# Altium PCB Module13.2_Proto_Board.PcbDoc
Units mm, origin at the board's own origin, x right, y up, seen from the top; angles counter-clockwise.
Board outline 50.1 x 50.1 mm, 2 copper layers (Top Layer, Bottom Layer); 2 components, 31 nets, 374 pads, 0 vias.
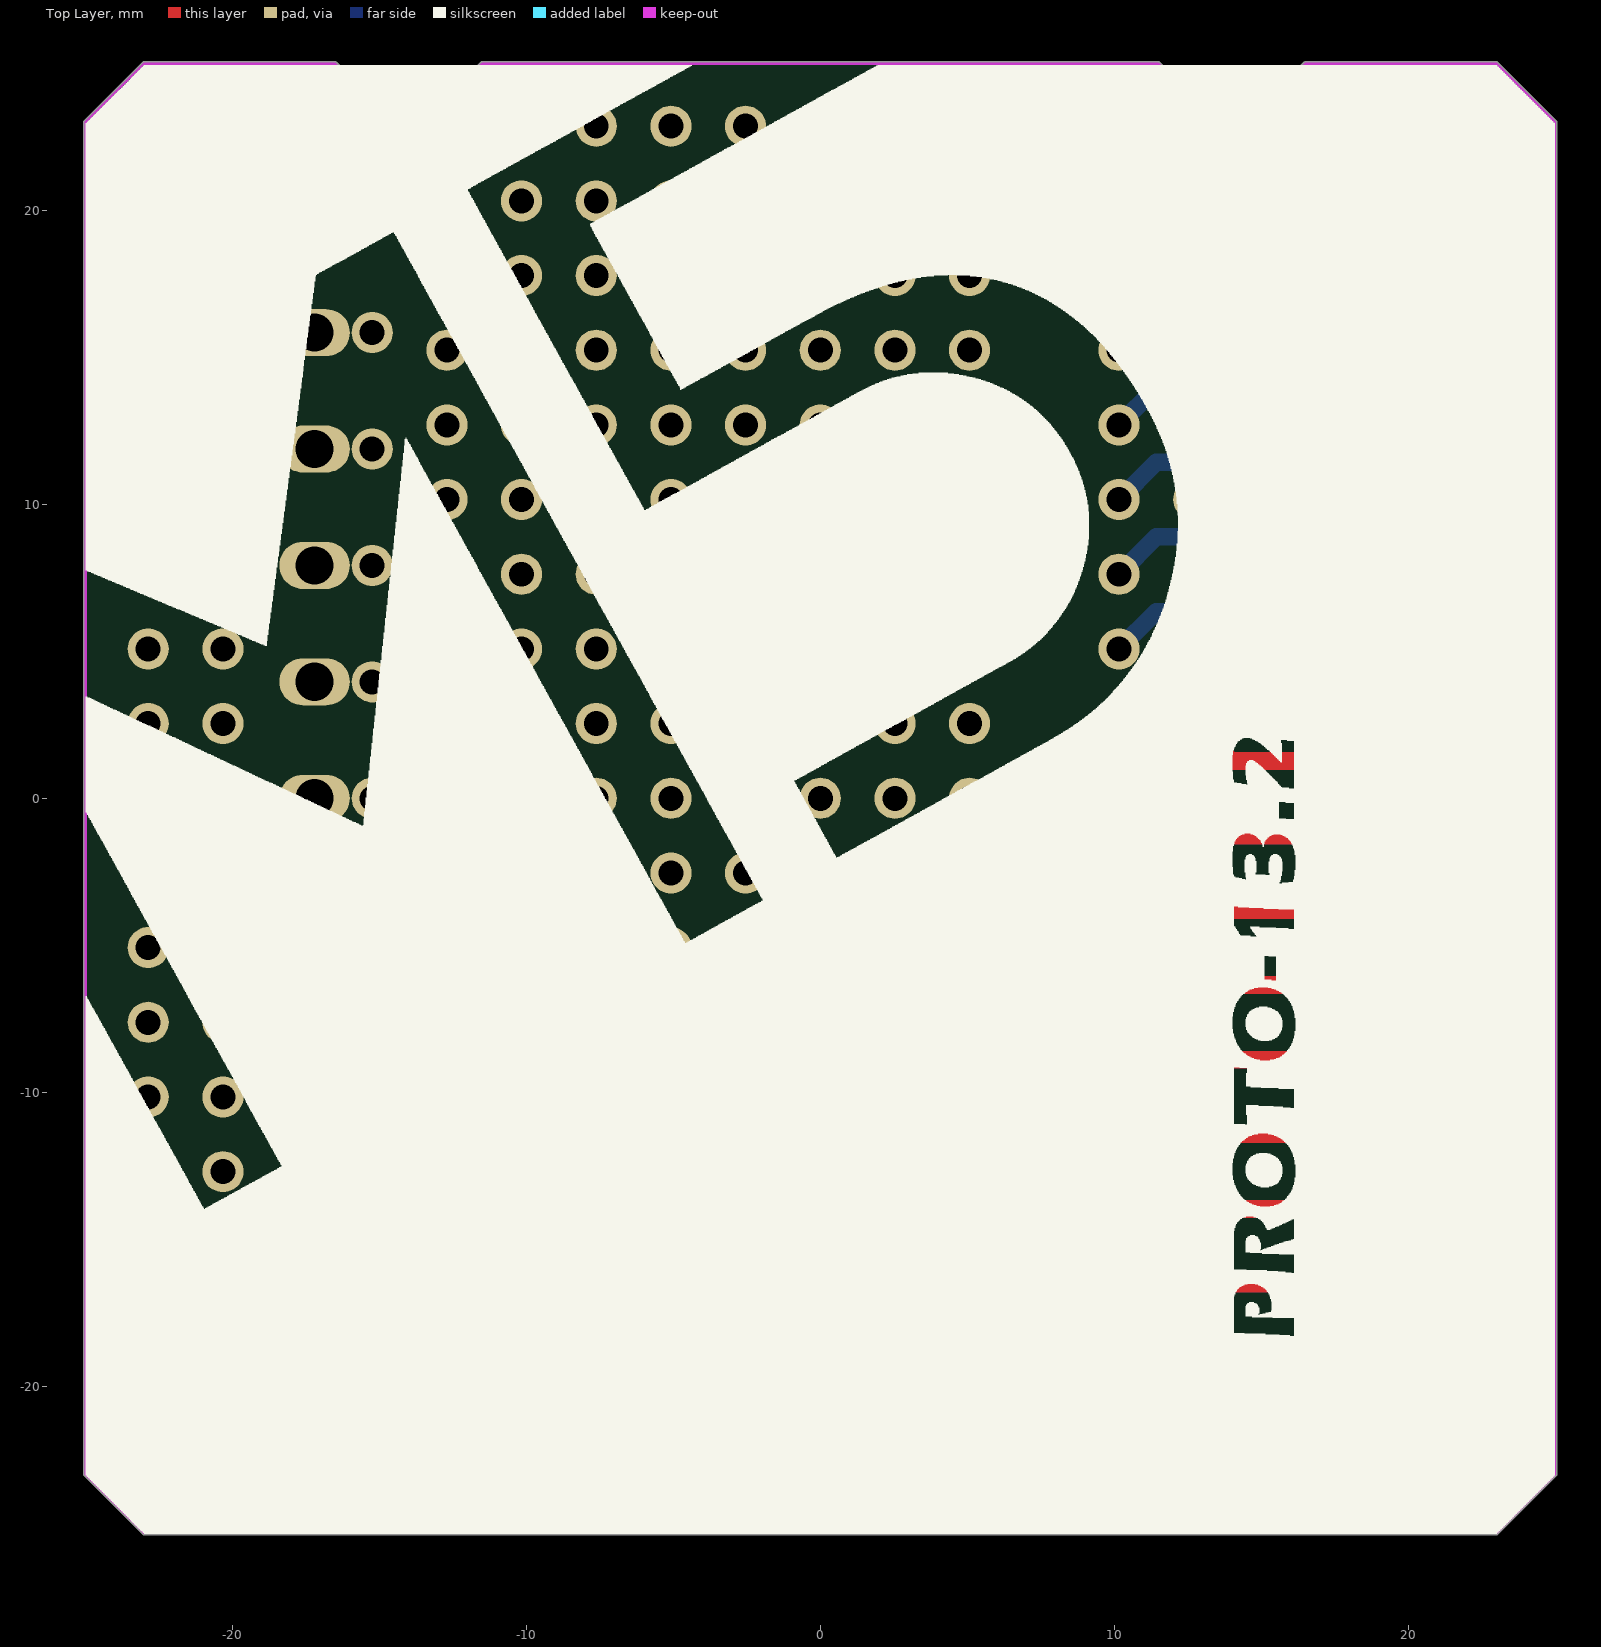
[diagram p0: Top Layer view]
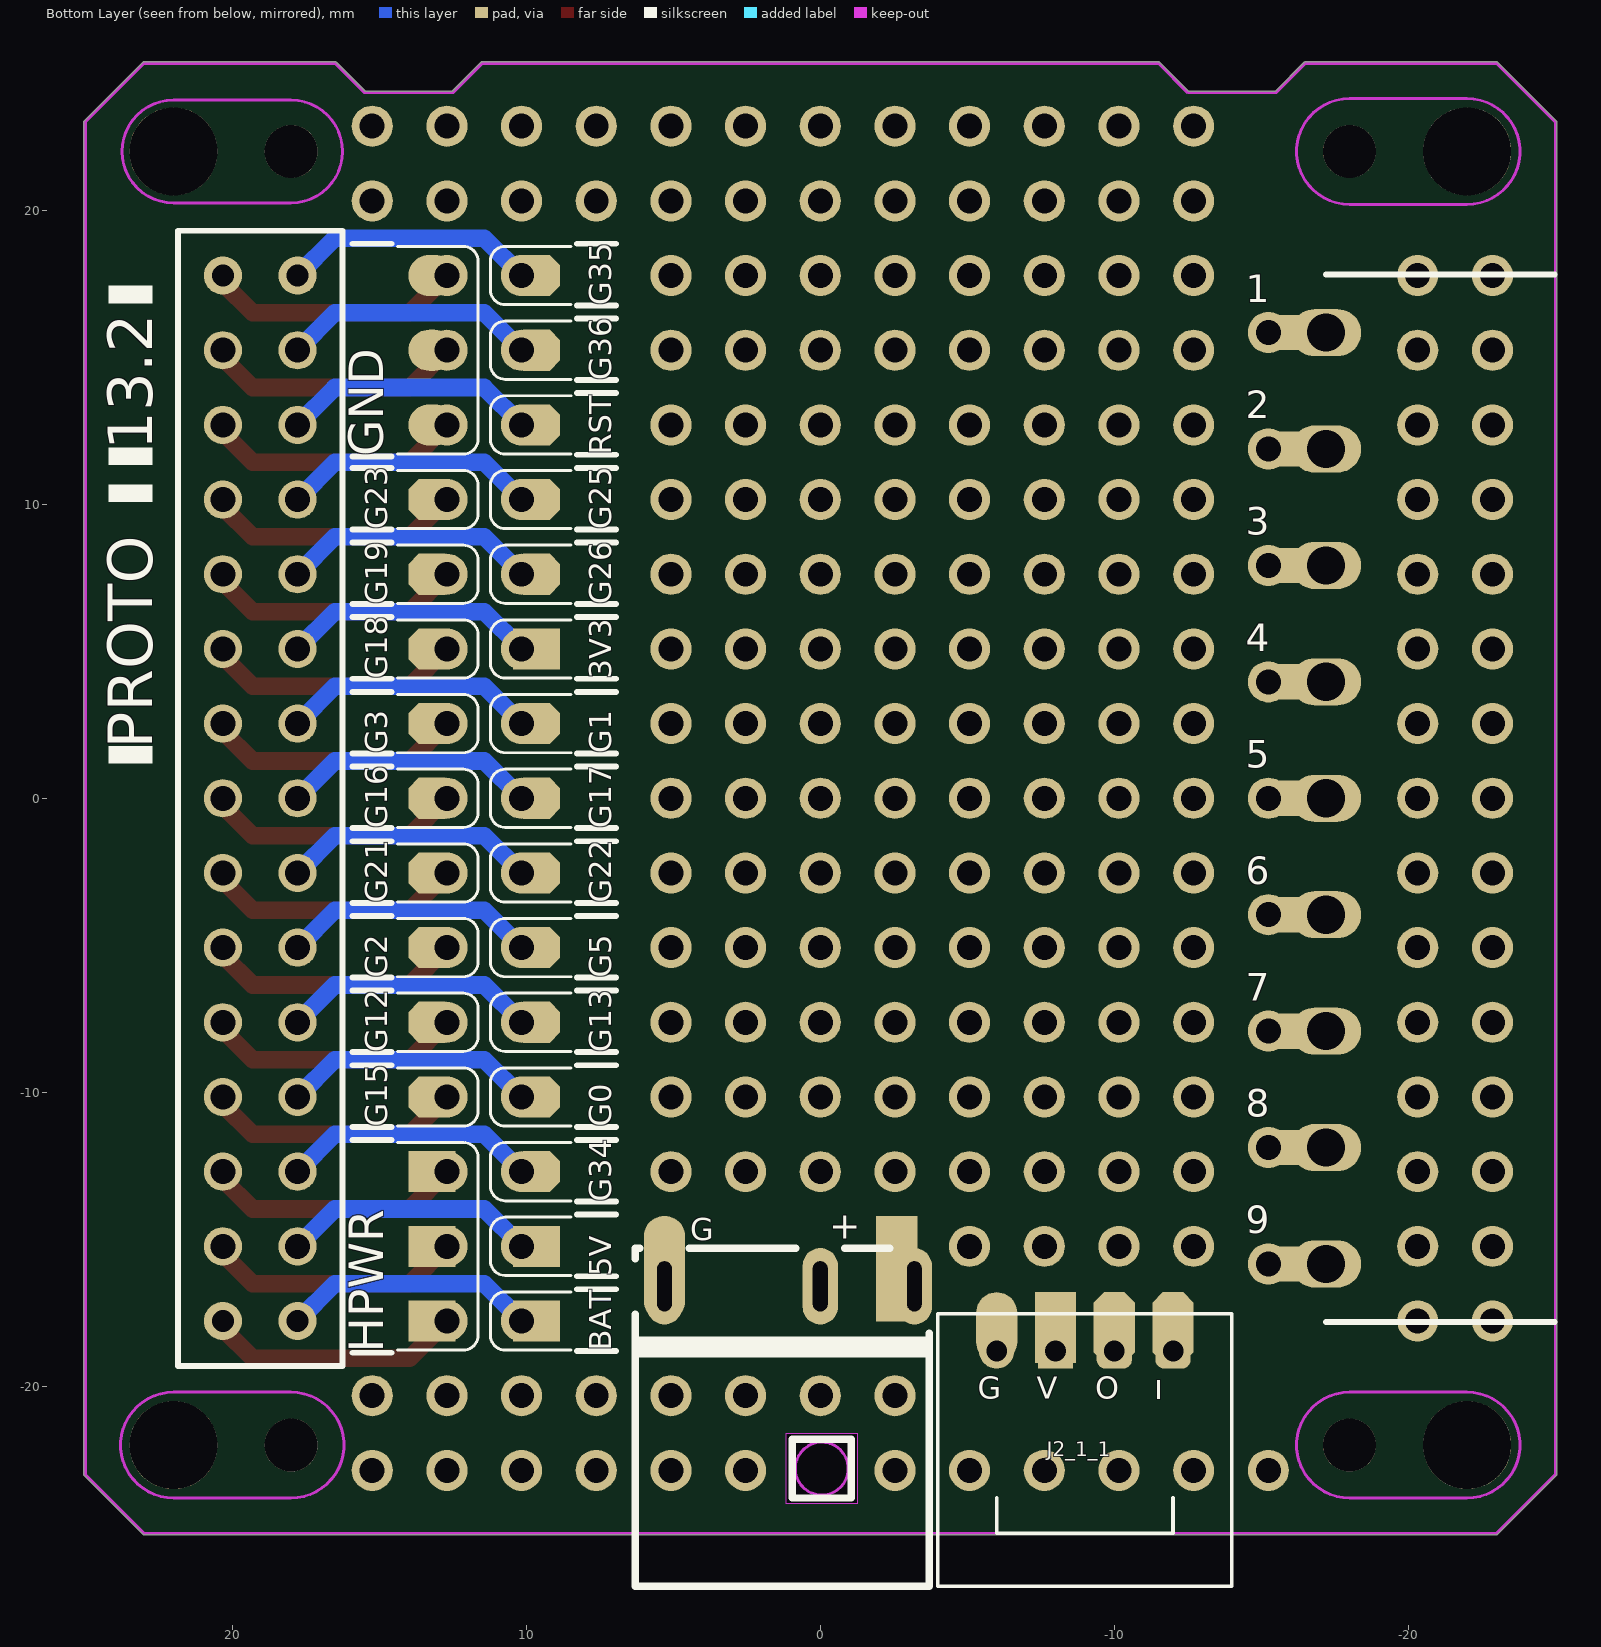
[diagram p1: Bottom Layer view, seen from below]

## Layer stack, top to bottom
Top Solder: solder mask 0.0102, Solder Resist, Dk 3.5
Top Layer: signal copper 0.0356
Dielectric1: dielectric 0.32, FR-4, Dk 4.8
Bottom Layer: signal copper 0.0356
Bottom Solder: solder mask 0.0102, Solder Resist, Dk 3.5

## Board outline
-25.035,-23.036 cw(c-25,-23) -25.05,-23 -25.05,23 cw(c-25,23) -25.035,23.036 -25.036,23.036 -23.036,25.036 -23.036,25.035 cw(c-23,25) -23,25.05 -16.501,25.05 cw(c-16.5,25) -16.464,25.035 -16.464,25.036 -15.479,24.05 -12.521,24.05 -11.536,25.036 -11.536,25.035 cw(c-11.5,25) -11.5,25.05 -2.5,25.05 8.25,25.05 cw(c8.25,25) 8.251,25.05 11.5,25.05 cw(c11.5,25) 11.536,25.035 11.536,25.036 12.521,24.05 15.479,24.05 16.464,25.036 16.464,25.035 cw(c16.5,25) 16.5,25.05 23,25.05 cw(c23,25) 23.036,25.035 23.036,25.036 25.036,23.036 25.035,23.036 cw(c25,23) 25.05,23 25.05,-23 cw(c25,-23) 25.035,-23.036 25.036,-23.036 23.036,-25.036 23.036,-25.035 cw(c23,-25) 22.999,-25.05 -2.5,-25.05 ccw(c-2.5,-25) -2.499,-25.05 -2.5,-25.05 -23,-25.05 cw(c-23,-25) -23.036,-25.035 -23.036,-25.036 ccw(c-23,-25) -22.998,-25.05 -23.036,-25.036

## Design rules (kind name [scope] priority, off if disabled: settings)
Clearance [All] p1: gap=0.254 ignorepadtopadclearanceinfootprint=FALSE except(0: Arc-Hole Track-Hole SMDPad-Hole THPad-Hole Via-Hole Fill-Hole Poly-Hole Region-Hole Text-Hole)
PolygonConnect [All] p1: connectstyle=Direct reliefconductorwidth=0.254 reliefentries=4 polygonreliefangle="90 Angle" airgapwidth=0.254
RoutingVias [All] p1: holewidth=0.3 width=0.6 viastyle="Through Hole" minholewidth=0.2 minwidth=0.6 maxholewidth=0.3 maxwidth=0.8
SolderMaskExpansion [All] p1: expansion=0.102
Width [InNet('No Net')] p1: maxlimit=0.254 minlimit=0.254 preferedwidth=0.254
30 further rules are at their usual default settings.

## Components (designator, comment, footprint, x,y, rotation, side; value= is the part's Value field where it differs from the comment)
J2_1_1 "GPIO_Socket_4P" Grove -9,-25 r270 bottom (schematic designator J2)
PWR1 "DC-IN-TH_DC-0440-2.5A-2.0" DC-IN-TH_DC-0440-2.5A-2.0 1.05,-16.6 r90 bottom locked

## Footprints (in the part's own frame and the unit in brackets; to place one, negate y for a bottom-side part, rotate by r counter-clockwise, add the part's x,y. Pads: shape width x height; smd on the part's side, far side on the other; paste and mask are expansions set on the pad)
DC-IN-TH_DC-0440-2.5A-2.0 [mm]
  oval 2.6x1.2 hole 0.5 slot 1.7 at 0 deg: 2-(0,4.25) 3(0,-1.05) 4+(0,-4.25)
  Keep-Out Layer board cut-out: -7.4,-2.3 -7.4,0.1 -5,0.1 -5,-2.3
  silkscreen extent -10.2,-4.75 1.3,5.25
Grove [mm]
  rect 1.2x1.2 hole 0.7: 5V(-6.2,-1)
  rrect50% 1.2x1.2 hole 0.7: G25(-6.2,1) G35(-6.2,3)
  round 1.2 hole 0.7: GND(-6.2,-3)
  silkscreen extent -7.47,-5 1.8,5

## Free pads (board coordinates)
  round 3 hole 3: 0(-22,-22) 0(-22,22) 0(22,-22) 0(22,22)
  round 1.8 hole 1.8: 0(-18,-22) 0(-18,22) 0(18,-22) 0(18,22)
  rrect100% 2.4x1.2 smd far side: 2(-16,-15.84) 2(-16,-11.88) 2(-16,-7.92) 2(-16,-3.96) 2(-16,0) 2(-16,3.96) 2(-16,7.92) 2(-16,11.88) 2(-16,15.84)
  oct 1.4x2.4 smd far side: 2(-12,-18) 2(-10,-18)
  rect 1.4x2.4 smd far side: 2(-8,-18)
  oval 1.4x2.4 smd far side: 2(-6,-18)
  rect 1.4x3.6 smd far side: 2(-2.6,-16)
  oval 1.4x3.6 smd far side: 2(5.3,-16)
  rect 1.6x1.4 smd far side: 2(9.652,-17.78) 2(9.652,-15.24) 2(9.652,5.08) 2(13.208,-17.78) 2(13.208,-15.24) 2(13.208,-12.7)
  oct 1.6x1.4 smd far side: 2(9.652,-12.7) 2(9.652,-10.16) 2(9.652,-7.62) 2(9.652,-5.08) 2(9.652,-2.54) 2(9.652,0) 2(9.652,2.54) 2(9.652,7.62) 2(9.652,10.16) 2(9.652,12.7) 2(9.652,15.24) 2(9.652,17.78) 2(13.208,-10.16) 2(13.208,-7.62) 2(13.208,-5.08) 2(13.208,-2.54) 2(13.208,0) 2(13.208,2.54) 2(13.208,5.08) 2(13.208,7.62) 2(13.208,10.16)
  rrect100% 1.6x1.4 smd far side: 2(13.208,12.7) 2(13.208,15.24) 2(13.208,17.78)
  rect 1x1.3 smd: 2(17.3,17.78) 2(20.8,17.78) 4(17.3,15.24) 4(20.8,15.24) 6(17.3,12.7) 6(20.8,12.7) 8(17.3,10.16) 8(20.8,10.16) 10(17.3,7.62) 10(20.8,7.62) 12(17.3,5.08) 12(20.8,5.08) 14(17.3,2.54) 14(20.8,2.54) 16(17.3,0) 16(20.8,0) 18(17.3,-2.54) 18(20.8,-2.54) 20(17.3,-5.08) 20(20.8,-5.08) 22(17.3,-7.62) 22(20.8,-7.62) 24(17.3,-10.16) 24(20.8,-10.16) 26(17.3,-12.7) 26(20.8,-12.7) 28(17.3,-15.24) 28(20.8,-15.24) 30(17.3,-17.78) 30(20.8,-17.78)
  round 3.6 on Top Solder: 35(-22,-22) 35(-22,22) 35(-18,-22) 35(-18,22) 35(18,-22) 35(22,-22)
  round 3.6 on Bottom Solder: 35(-22,-22) 35(-22,22) 35(-18,-22) 35(-18,22) 35(18,-22) 35(22,-22)
  round 3.5 on Bottom Solder: 35(18,22) 35(22,22)
  round 3.5 on Top Solder: 35(18,22) 35(22,22)
  round 1 on Bottom Overlay: 35(22.711,1.68) 35(22.711,10.18) 35(22.711,11.84) 35(22.711,16.936) 35(24.211,1.68) 35(24.211,10.18) 35(24.211,11.84) 35(24.211,16.936)
  round 1.4 hole 0.85: ""(-22.86,-17.78) ""(-22.86,-15.24) ""(-22.86,-12.7) ""(-22.86,-10.16) ""(-22.86,-7.62) ""(-22.86,-5.08) ""(-22.86,-2.54) ""(-22.86,0) ""(-22.86,2.54) ""(-22.86,5.08) ""(-22.86,7.62) ""(-22.86,10.16) ""(-22.86,12.7) ""(-22.86,15.24) ""(-22.86,17.78) ""(-20.32,-17.78) ""(-20.32,-15.24) ""(-20.32,-12.7) ""(-20.32,-10.16) ""(-20.32,-7.62) ""(-20.32,-5.08) ""(-20.32,-2.54) ""(-20.32,0) ""(-20.32,2.54) ""(-20.32,5.08) ""(-20.32,7.62) ""(-20.32,10.16) ""(-20.32,12.7) ""(-20.32,15.24) ""(-20.32,17.78) ""(-15.24,-22.86) ""(-15.24,-15.84) ""(-15.24,-11.88) ""(-15.24,-7.92) ""(-15.24,-3.96) ""(-15.24,0) ""(-15.24,3.96) ""(-15.24,7.92) ""(-15.24,11.88) ""(-15.24,15.84) ""(-12.7,-22.86) ""(-12.7,-15.24) ""(-12.7,-12.7) ""(-12.7,-10.16) ""(-12.7,-7.62) ""(-12.7,-5.08) ""(-12.7,-2.54) ""(-12.7,0) ""(-12.7,2.54) ""(-12.7,5.08) ""(-12.7,7.62) ""(-12.7,10.16) ""(-12.7,12.7) ""(-12.7,15.24) ""(-12.7,17.78) ""(-12.7,20.32) ""(-12.7,22.86) ""(-10.16,-22.86) ""(-10.16,-15.24) ""(-10.16,-12.7) ""(-10.16,-10.16) ""(-10.16,-7.62) ""(-10.16,-5.08) ""(-10.16,-2.54) ""(-10.16,0) ""(-10.16,2.54) ""(-10.16,5.08) ""(-10.16,7.62) ""(-10.16,10.16) ""(-10.16,12.7) ""(-10.16,15.24) ""(-10.16,17.78) ""(-10.16,20.32) ""(-10.16,22.86) ""(-7.62,-22.86) ""(-7.62,-15.24) ""(-7.62,-12.7) ""(-7.62,-10.16) ""(-7.62,-7.62) ""(-7.62,-5.08) ""(-7.62,-2.54) ""(-7.62,0) ""(-7.62,2.54) ""(-7.62,5.08) ""(-7.62,7.62) ""(-7.62,10.16) ""(-7.62,12.7) ""(-7.62,15.24) ""(-7.62,17.78) ""(-7.62,20.32) ""(-7.62,22.86) ""(-5.08,-22.86) ""(-5.08,-15.24) ""(-5.08,-12.7) ""(-5.08,-10.16) ""(-5.08,-7.62) ""(-5.08,-5.08) ""(-5.08,-2.54) ""(-5.08,0) ""(-5.08,2.54) ""(-5.08,5.08) ""(-5.08,7.62) ""(-5.08,10.16) ""(-5.08,12.7) ""(-5.08,15.24) ""(-5.08,17.78) ""(-5.08,20.32) ""(-5.08,22.86) ""(-2.54,-22.86) ""(-2.54,-20.32) ""(-2.54,-12.7) ""(-2.54,-10.16) ""(-2.54,-7.62) ""(-2.54,-5.08) ""(-2.54,-2.54) ""(-2.54,0) ""(-2.54,2.54) ""(-2.54,5.08) ""(-2.54,7.62) ""(-2.54,10.16) ""(-2.54,12.7) ""(-2.54,15.24) ""(-2.54,17.78) ""(-2.54,20.32) ""(-2.54,22.86) ""(0,-20.32) ""(0,-12.7) ""(0,-10.16) ""(0,-7.62) ""(0,-5.08) ""(0,-2.54) ""(0,0) ""(0,2.54) ""(0,5.08) ""(0,7.62) ""(0,10.16) ""(0,12.7) ""(0,15.24) ""(0,17.78) ""(0,20.32) ""(0,22.86) ""(2.54,-22.86) ""(2.54,-20.32) ""(2.54,-12.7) ""(2.54,-10.16) ""(2.54,-7.62) ""(2.54,-5.08) ""(2.54,-2.54) ""(2.54,0) ""(2.54,2.54) ""(2.54,5.08) ""(2.54,7.62) ""(2.54,10.16) ""(2.54,12.7) ""(2.54,15.24) ""(2.54,17.78) ""(2.54,20.32) ""(2.54,22.86) ""(5.08,-22.86) ""(5.08,-20.32) ""(5.08,-12.7) ""(5.08,-10.16) ""(5.08,-7.62) ""(5.08,-5.08) ""(5.08,-2.54) ""(5.08,0) ""(5.08,2.54) ""(5.08,5.08) ""(5.08,7.62) ""(5.08,10.16) ""(5.08,12.7) ""(5.08,15.24) ""(5.08,17.78) ""(5.08,20.32) ""(5.08,22.86) ""(7.62,-22.86) ""(7.62,-20.32) ""(7.62,20.32) ""(7.62,22.86) ""(10.16,-22.86) ""(10.16,-20.32) ""(10.16,-17.78) ""(10.16,-15.24) ""(10.16,-12.7) ""(10.16,-10.16) ""(10.16,-7.62) ""(10.16,-5.08) ""(10.16,-2.54) ""(10.16,0) ""(10.16,2.54) ""(10.16,5.08) ""(10.16,7.62) ""(10.16,10.16) ""(10.16,12.7) ""(10.16,15.24) ""(10.16,17.78) ""(10.16,20.32) ""(10.16,22.86) ""(12.7,-22.86) ""(12.7,-20.32) ""(12.7,-17.78) ""(12.7,-15.24) ""(12.7,-12.7) ""(12.7,-10.16) ""(12.7,-7.62) ""(12.7,-5.08) ""(12.7,-2.54) ""(12.7,0) ""(12.7,2.54) ""(12.7,5.08) ""(12.7,7.62) ""(12.7,10.16) ""(12.7,12.7) ""(12.7,15.24) ""(12.7,17.78) ""(12.7,20.32) ""(12.7,22.86) ""(15.24,-22.86) ""(15.24,-20.32) ""(15.24,20.32) ""(15.24,22.86)
  rrect100% 2.4x1.6 hole 1.3: ""(-17.2,-15.84) ""(-17.2,-11.88) ""(-17.2,-7.92) ""(-17.2,-3.96) ""(-17.2,0) ""(-17.2,3.96) ""(-17.2,7.92) ""(-17.2,11.88) ""(-17.2,15.84)
  round 1.3 hole 0.75: ""(17.78,-17.78) ""(17.78,17.78) ""(20.32,-17.78) ""(20.32,17.78)
  round 1.3 hole 0.85: ""(17.78,-15.24) ""(17.78,-12.7) ""(17.78,-10.16) ""(17.78,-7.62) ""(17.78,-5.08) ""(17.78,-2.54) ""(17.78,0) ""(17.78,2.54) ""(17.78,5.08) ""(17.78,7.62) ""(17.78,10.16) ""(17.78,12.7) ""(17.78,15.24) ""(20.32,-15.24) ""(20.32,-12.7) ""(20.32,-10.16) ""(20.32,-7.62) ""(20.32,-5.08) ""(20.32,-2.54) ""(20.32,0) ""(20.32,2.54) ""(20.32,5.08) ""(20.32,7.62) ""(20.32,10.16) ""(20.32,12.7) ""(20.32,15.24)

## Nets (pads, with @x,y where several pads share a name; then routed paths per layer and width w, separated by ;. In a path a pad name is that pad's centre, name@x,y a point inside that pad or via, vN(x,y) a via of type N, cw(c..) or ccw(c..) an arc to the next point about the centre after c; other vN are vias at no path point)
5V2: 
12V: pad.2@-2.6,-16 PWR1.4+
+3.3V: pad.12@17.3,5.08 pad.@17.78,5.08 | length 8.7
  Bottom Layer w0.6: 10.16,5.08 11.43,6.35 16.51,6.35 pad.@17.78,5.08
+5V: pad.28@17.3,-15.24 pad.@17.78,-15.24 | length 8.7
  Bottom Layer w0.6: 10.16,-15.24 11.43,-13.97 16.51,-13.97 pad.@17.78,-15.24
ComRst: 
G25: pad.8@17.3,10.16 pad.@17.78,10.16 | length 8.7
  Bottom Layer w0.6: 10.16,10.16 11.43,11.43 16.51,11.43 pad.@17.78,10.16
G26: pad.10@17.3,7.62 pad.@17.78,7.62 | length 8.7
  Bottom Layer w0.6: 10.16,7.62 11.43,8.89 16.51,8.89 pad.@17.78,7.62
GND: pad.2@5.3,-16 pad.2@20.8,17.78 pad.4@20.8,15.24 pad.6@20.8,12.7 pad.@20.32,12.7 pad.@20.32,15.24 pad.@20.32,17.78 PWR1.2- | length 17.1
  Top Layer w0.6: 12.7,12.7 13.97,11.43 19.304,11.43 pad.@20.32,12.446 ; 12.7,15.24 13.97,13.97 19.304,13.97 pad.@20.32,14.986
GPIO0: pad.24@17.3,-10.16 pad.@17.78,-10.16 | length 8.7
  Bottom Layer w0.6: 10.16,-10.16 11.43,-8.89 16.51,-8.89 pad.@17.78,-10.16
GPIO1: 
GPIO2: pad.20@20.8,-5.08 pad.@20.32,-5.08 | length 8.6
  Top Layer w0.6: 12.7,-5.08 13.97,-6.35 19.304,-6.35 pad.@20.32,-5.334
GPIO3: 
GPIO5: pad.20@17.3,-5.08 pad.@17.78,-5.08 | length 8.7
  Bottom Layer w0.6: 10.16,-5.08 11.43,-3.81 16.51,-3.81 pad.@17.78,-5.08
GPIO13: pad.22@17.3,-7.62 pad.@17.78,-7.62 | length 8.7
  Bottom Layer w0.6: 10.16,-7.62 11.43,-6.35 16.51,-6.35 pad.@17.78,-7.62
GPIO15: pad.24@20.8,-10.16 pad.@20.32,-10.16 | length 8.6
  Top Layer w0.6: 12.7,-10.16 13.97,-11.43 19.304,-11.43 pad.@20.32,-10.414
GPIO16: pad.16@20.8,0 pad.@20.32,0 | length 8.6
  Top Layer w0.6: 12.7,0 13.97,-1.27 19.304,-1.27 pad.@20.32,-0.254
GPIO17: pad.16@17.3,0 pad.@17.78,0 | length 8.7
  Bottom Layer w0.6: 10.16,0 11.43,1.27 16.51,1.27 pad.@17.78,0
GPIO34: 
GPIO35: pad.2@17.3,17.78 pad.@17.78,17.78
GPIO36: pad.4@17.3,15.24 pad.@17.78,15.24 | length 8.7
  Bottom Layer w0.6: 10.16,15.24 11.43,16.51 16.51,16.51 pad.@17.78,15.24
NetC1_2: 
NetR7_1: 
NetR8_1: 
NetR9_2: 
PPS: 
RST: pad.6@17.3,12.7 pad.@17.78,12.7 | length 8.7
  Bottom Layer w0.6: 10.16,12.7 11.43,13.97 16.51,13.97 pad.@17.78,12.7
RXD: 
SW: 
TXD: 
V_BCKP: 
VSIM: 
pads on no net: J2_1_1.5V J2_1_1.G25 J2_1_1.G35 J2_1_1.GND PWR1.3
copper on no net: | length 129.3
  Top Layer w0.6: 12.7,-17.78 13.97,-19.05 19.304,-19.05 20.32,-18.034 ; 12.7,-15.24 13.97,-16.51 19.304,-16.51 20.32,-15.494 ; 12.7,-12.7 13.97,-13.97 19.304,-13.97 20.32,-12.954 ; 12.7,-7.62 13.97,-8.89 19.304,-8.89 20.32,-7.874 ; 12.7,-2.54 13.97,-3.81 19.304,-3.81 20.32,-2.794 ; 12.7,2.54 13.97,1.27 19.304,1.27 20.32,2.286 ; 12.7,5.08 13.97,3.81 19.304,3.81 20.32,4.826 ; 12.7,7.62 13.97,6.35 19.304,6.35 20.32,7.366 ; 12.7,10.16 13.97,8.89 19.304,8.89 20.32,9.906 ; 12.7,17.78 13.97,16.51 19.304,16.51 20.32,17.526 20.32,17.78
  Bottom Layer w0.6: 10.16,-17.78 11.43,-16.51 16.51,-16.51 17.78,-17.78 ; 10.16,-12.7 11.43,-11.43 16.51,-11.43 17.78,-12.7 ; 10.16,-2.54 11.43,-1.27 16.51,-1.27 17.78,-2.54 ; 10.16,2.54 11.43,3.81 16.51,3.81 17.78,2.54 ; 10.16,17.78 11.43,19.05 16.51,19.05 17.78,17.78

## Keep-outs
Keep-Out Layer:
  circle w0.1: c-0.05,-22.8 r0.9
  lines w0.1: -25,-23 -23,-25 23,-25 25,-23 25,23 23,25 16.5,25 15.5,24 12.5,24 11.5,25 -2.5,25 -11.5,25 -12.5,24 -15.5,24 -16.5,25 -23,25 -25,23 -25,19.5 -25,-19.5 -25,-23 ; -22,-23.8 cw(c-22,-22) -22,-20.2 -18,-20.2 cw(c-18,-22) -18,-23.8 -22,-23.8 ; -22,20.2 cw(c-22,22) -22,23.8 -18,23.8 cw(c-18,22) -18,20.2 -22,20.2 ; 18,-23.8 cw(c18,-22) 18,-20.2 22,-20.2 cw(c22,-22) 22,-23.8 18,-23.8 ; 18,20.25 cw(c18,22) 18,23.75 22,23.75 cw(c22,22) 22,20.25 18,20.25

## Other copper
Top Layer:
  pour cut-out: 4.53,-16 4.53,-17.6 6.1,-17.6 6.1,-16
  pour cut-out: 4.545,-16.8 4.545,-18.4 6.115,-18.4 6.115,-16.8
Bottom Layer:
  pour cut-out: 6.07,-15.3 6.07,-18.3 4.5,-18.3 4.5,-15.3

## Silkscreen, mask and mechanical layers (free items; w line width, h text height)
Top Overlay:
  drawing of 6001 lines, arcs and shapes, not listed
Bottom Overlay:
  drawing of 197 lines, arcs and shapes, not listed
  text "G35" at 6.858,16.764 h1.3 r270
  text "1" at -14.478,16.574 h1.6
  text "G36" at 6.858,14.224 h1.3 r270
  text "2" at -14.478,12.614 h1.6
  text "13.2" at 22.211,11.84 h2.6 r270
  text "RST" at 6.858,11.684 h1.3 r270
  text "GND" at 14.478,11.633 h2 r270
  text "G25" at 6.858,9.144 h1.3 r270
  text "G23" at 14.478,9.144 h1.3 r270
  text "3" at -14.478,8.654 h1.6
  text "G26" at 6.858,6.604 h1.3 r270
  text "G19" at 14.478,6.604 h1.3 r270
  text "4" at -14.478,4.694 h1.6
  text "3V3" at 6.858,4.064 h1.3 r270
  text "G18" at 14.478,4.064 h1.3 r270
  text "PROTO" at 22.211,1.68 h2.6 r270
  text "G1" at 6.858,1.524 h1.3 r270
  text "G3" at 14.478,1.524 h1.3 r270
  text "5" at -14.478,0.734 h1.6
  text "G17" at 6.858,-1.016 h1.3 r270
  text "G16" at 14.478,-1.016 h1.3 r270
  text "6" at -14.478,-3.226 h1.6
  text "G22" at 6.858,-3.556 h1.3 r270
  text "G21" at 14.478,-3.556 h1.3 r270
  text "G5" at 6.858,-6.096 h1.3 r270
  text "G2" at 14.478,-6.096 h1.3 r270
  text "7" at -14.478,-7.186 h1.6
  text "G13" at 6.858,-8.636 h1.3 r270
  text "G12" at 14.478,-8.636 h1.3 r270
  text "8" at -14.478,-11.146 h1.6
  text "G0" at 6.858,-11.176 h1.3 r270
  text "G15" at 14.478,-11.176 h1.3 r270
  text "G34" at 6.858,-13.716 h1.3 r270
  text "9" at -14.478,-15.106 h1.6
  text "+" at -0.305,-15.291 h1.6
  text "G" at 4.42,-15.291 h1.3
  text "5V" at 6.858,-16.256 h1.3 r270
  text "BAT" at 6.858,-18.796 h1.3 r270
  text "HPWR" at 14.478,-18.86 h2 r270
  text "I" at -11.359,-20.676 h1.3
  text "O" at -9.359,-20.676 h1.3
  text "V" at -7.359,-20.676 h1.3
  text "G" at -5.359,-20.676 h1.3
Top Solder:
  region: 22,23.75 18,23.75 18,20.25 22,20.25
  rectangle: -22,20.2 -18,23.8
  rectangle: -22,-23.8 -18,-20.2
  rectangle: 18,-23.8 22,-20.2
Bottom Solder:
  rectangle: 18,20.25 22,23.75
  region: -18,23.8 -22,23.8 -22,20.2 -18,20.2
  region: -18,-20.2 -22,-20.2 -22,-23.8 -18,-23.8
  region: 22,-20.2 18,-20.2 18,-23.8 22,-23.8
Mechanical 1:
  circle w0.1: c-0.05,-22.8 r0.9
  lines w0.1: -25,-23 -23,-25 ; -25,-23 -25,23 -23,25 -16.5,25 ; -25,-23 -23,-25 ; -23,-25 -2.5,-25 23,-25 ; -16.5,25 -15.5,24 -12.5,24 -11.5,25 -2.5,25 8.25,25 ; -16.5,25 -16.5,25 ; 8.25,25 11.5,25 12.5,24 15.5,24 16.5,25 23,25 25,23 25,-23 23,-25 ; 8.25,25 8.25,25 ; 23,-25 23,-25